# Altium PCB HDD.PcbDoc
Units mm, origin at the board's own origin, x right, y up, seen from the top; angles counter-clockwise.
Board outline 75 x 50 mm, 2 copper layers (Top Layer, Bottom Layer); 40 components, 27 nets, 94 pads, 174 vias.
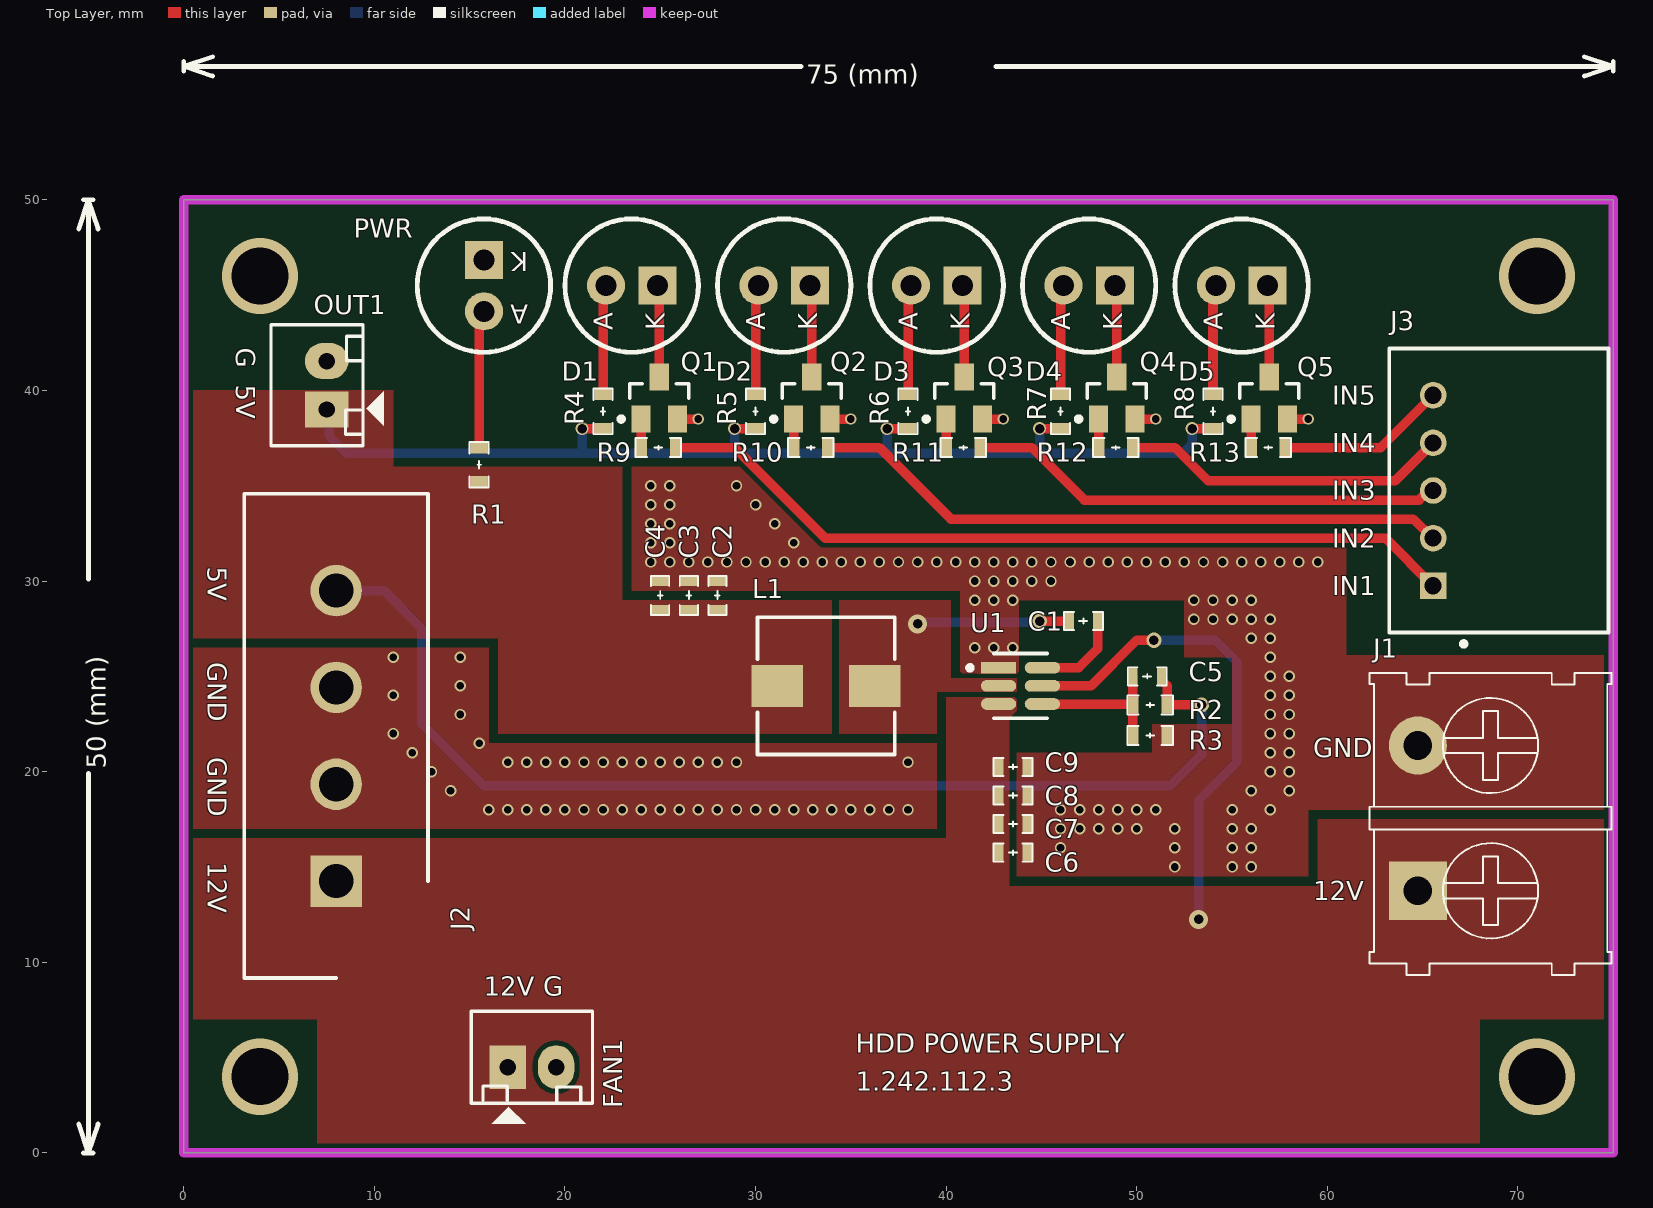
[diagram p0: Top Layer view]
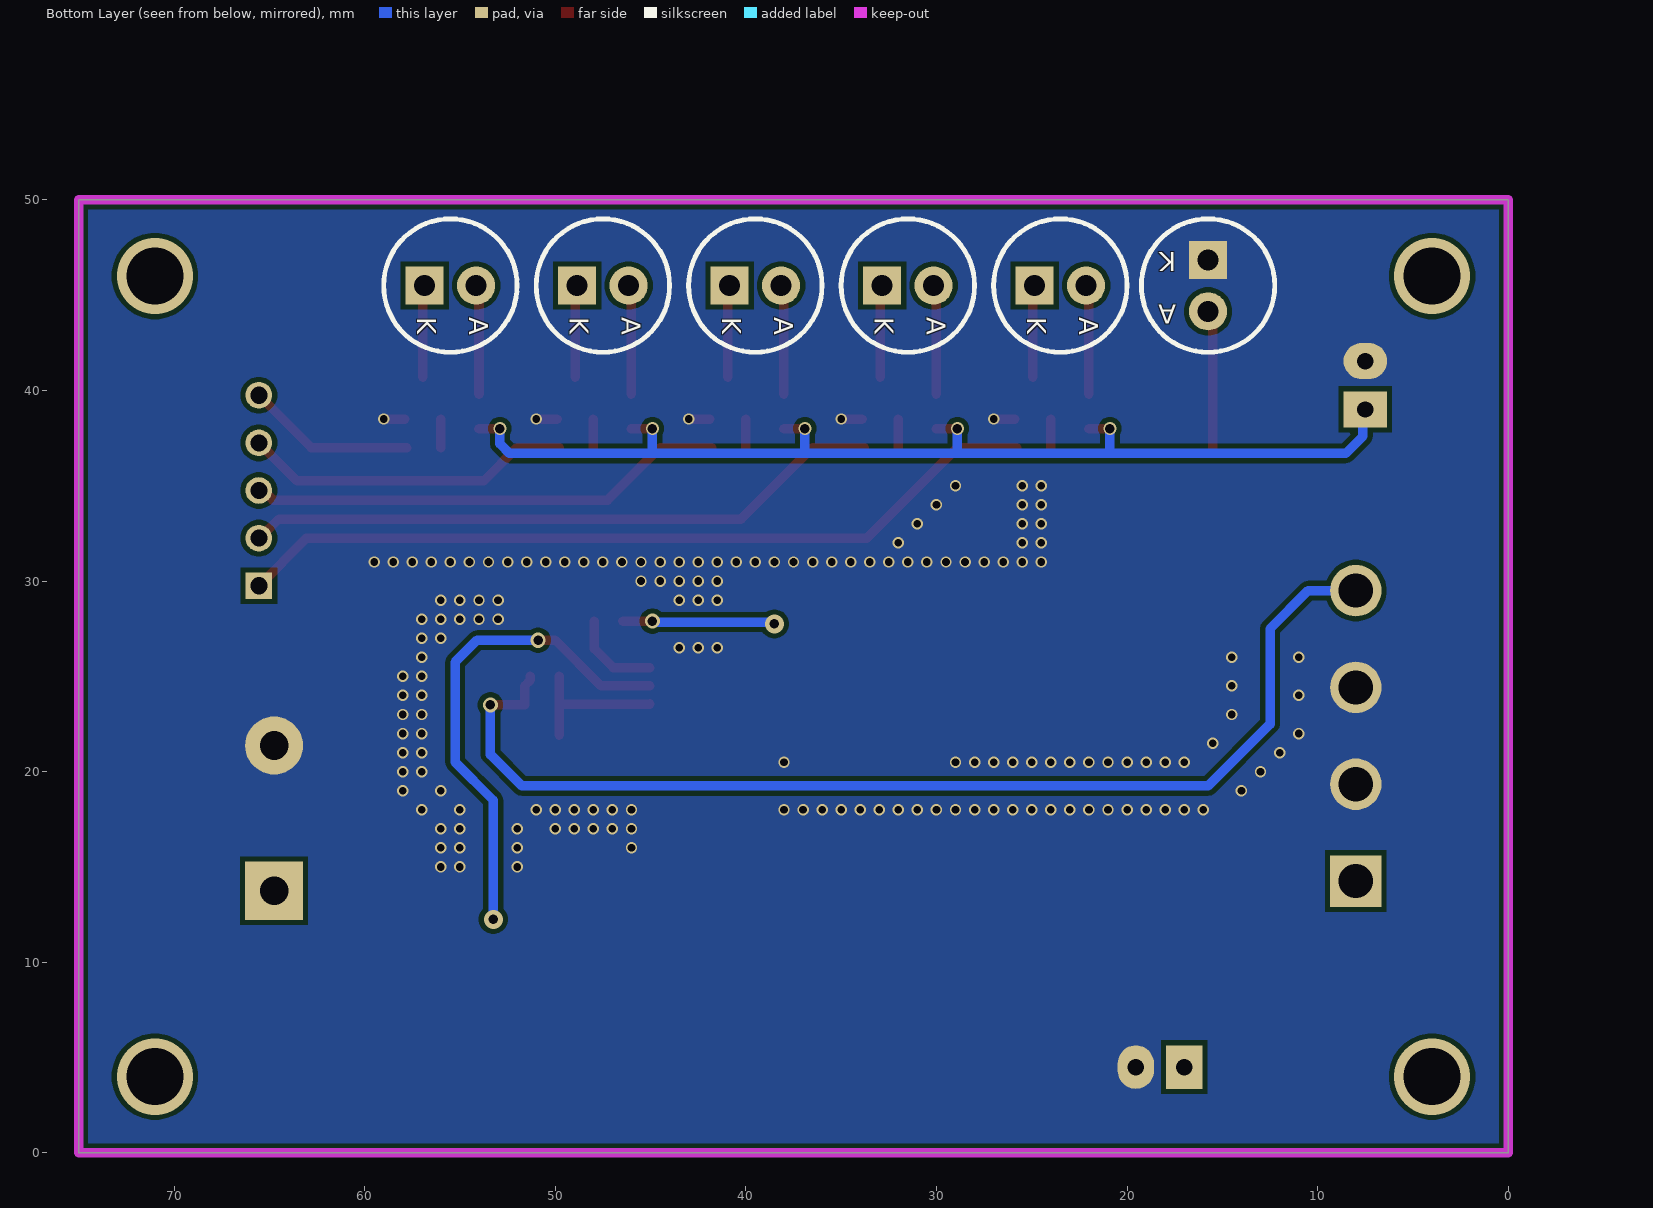
[diagram p1: Bottom Layer view, seen from below]
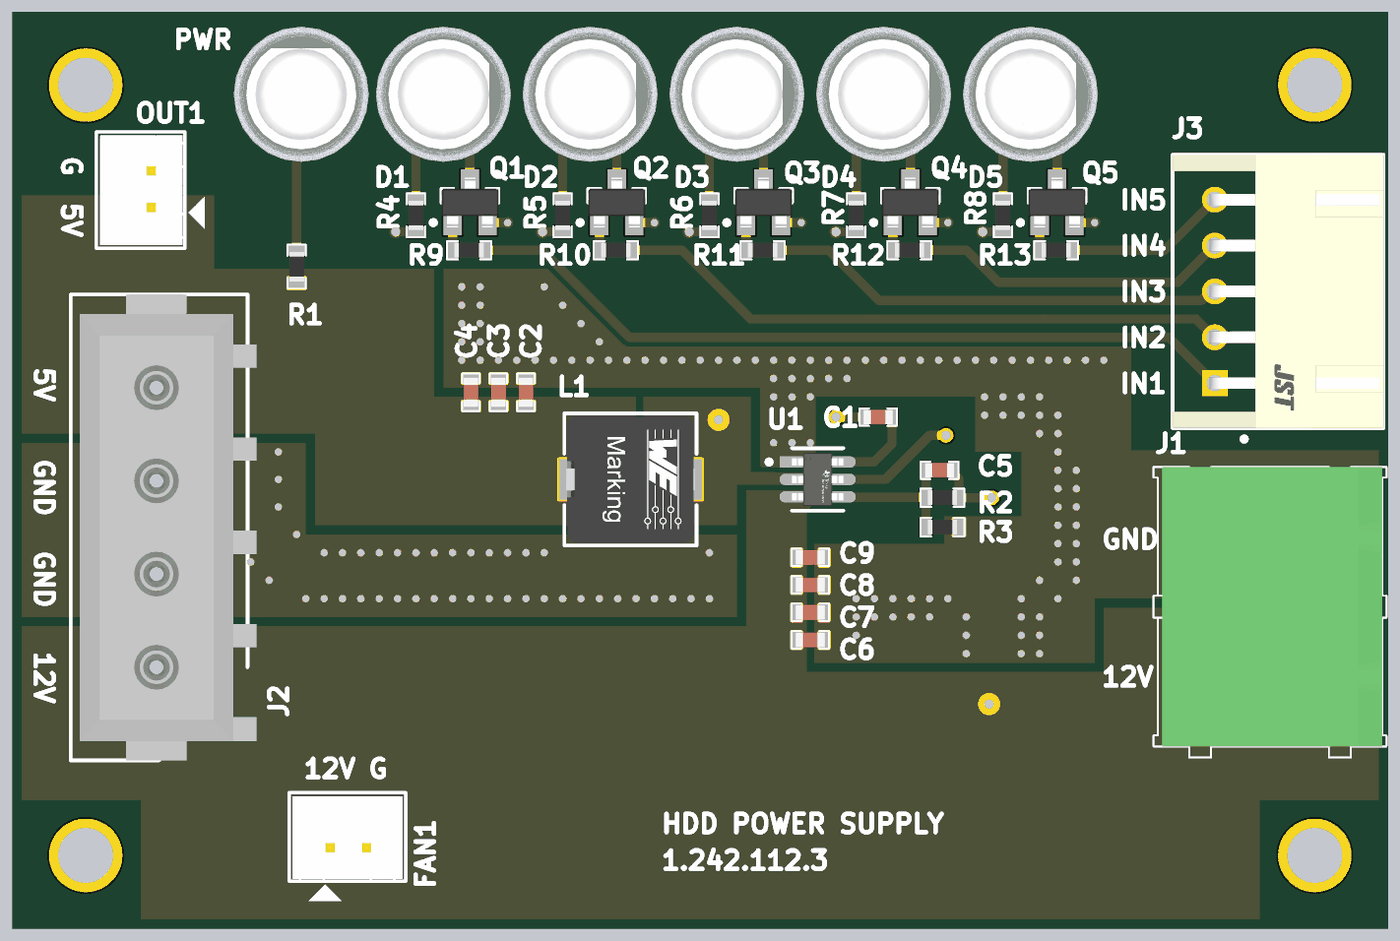
[diagram p2: 3D render of the assembled board from above, using the file's embedded part models]

## Layer stack, top to bottom
Top Solder: solder mask 0.0102, Solder Resist, Dk 3.5
Top Layer: signal copper 0.0356
Dielectric 1: dielectric 0.32, FR-4, Dk 4.8
Bottom Layer: signal copper 0.0356
Bottom Solder: solder mask 0.0102, Solder Resist, Dk 3.5

## Board outline
0,0 0,50 75,50 75,0

## Design rules (kind name [scope] priority, off if disabled: settings)
Clearance [All] p1: gap=0.254 ignorepadtopadclearanceinfootprint=FALSE
HoleSize [All] p1: absolutevalues=TRUE maxlimit=5 minlimit=0.2 maxpercent=80.000 minpercent=20.000
PolygonConnect [All] p1: connectstyle=Direct reliefconductorwidth=0.254 reliefentries=4 polygonreliefangle="90 Angle" airgapwidth=0.254
RoutingVias [All] p1: holewidth=0.2 width=1 viastyle="Through Hole" minholewidth=0.2 minwidth=0.5 maxholewidth=0.2 maxwidth=5
SilkToSilkClearance [All] p1: silktosilkclearance=0.01
SilkToSolderMaskClearance [IsPad vs InPadClass('All Pads')] p1: minsilkscreentomaskgap=0 clearancetoexposedcopper=TRUE
SolderMaskExpansion [All] p1: expansion=0.102 istentingtop=FALSE
Width [All] p1: maxlimit=0.5 minlimit=0.5 preferedwidth=0.5
27 further rules are at their usual default settings.

## Components (designator, comment, footprint, x,y, rotation, side; value= is the part's Value field where it differs from the comment)
C1 "0.1u" CAP-CER-0603 47.2,27.9 r0 top
C2 "10u" CAP-CER-0603 28,29.25 r270 top
C3 "22u" CAP-CER-0603 26.5,29.25 r270 top
C4 "22u" CAP-CER-0603 25,29.25 r270 top
C5 "0.1u" CAP-CER-0603 50.55,25 r0 top
C6 "10u" CAP-CER-0603 43.5,15.75 r180 top
C7 "10u" CAP-CER-0603 43.5,17.25 r180 top
C8 "0.1u" CAP-CER-0603 43.5,18.75 r180 top
C9 "0.1u" CAP-CER-0603 43.5,20.25 r180 top
D1 "LED" SLM-490 23.5,45.5 r90 top
D2 "LED" SLM-490 31.5,45.5 r90 top
D3 "LED" SLM-490 39.5,45.5 r90 top
D4 "LED" SLM-490 47.5,45.5 r90 top
D5 "LED" SLM-490 55.5,45.5 r90 top
FAN1 "Header2" Header2 17,4.5 r0 top
J1 "KF2" KF2-7.62 68.56,17.56 r90 top
J2 "770997-1" RHDR4W158P0X508_1X4_2540X965X1156P 8,14.26 r90 top
J3 "S5B-XH-A(LF)(SN)" FP-S5B-XH-A_LF_SN-MFG 69,34.75 r270 top
L1 "2.2u" WE-HCI_7040 33.7,24.5 r270 top
OUT1 "Header2" Header2 7.5,39 r90 top
PWR "LED" SLM-490 15.75,45.5 r180 top
Q1 "MMBT3904" FAIR-SOT23-3_V 24.95,39.6 r90 top
Q2 "MMBT3904" FAIR-SOT23-3_V 32.95,39.6 r90 top
Q3 "MMBT3904" FAIR-SOT23-3_V 40.95,39.6 r90 top
Q4 "MMBT3904" FAIR-SOT23-3_V 48.95,39.6 r90 top
Q5 "MMBT3904" FAIR-SOT23-3_V 56.95,39.6 r90 top
R1 "1k" RES-SMD-0603 15.5,36.1 r90 top
R2 "56k" RES-SMD-0603 50.7,23.5 r0 top
R3 "10k" RES-SMD-0603 50.7,21.9 r180 top
R4 "1k" RES-SMD-0603 22,38.9 r270 top
R5 "1k" RES-SMD-0603 30,38.9 r270 top
R6 "1k" RES-SMD-0603 38,38.9 r270 top
R7 "1k" RES-SMD-0603 46,38.9 r270 top
R8 "1k" RES-SMD-0603 54,38.9 r270 top
R9 "330R" RES-SMD-0603 24.9,37 r180 top
R10 "330R" RES-SMD-0603 32.9,37 r180 top
R11 "330R" RES-SMD-0603 40.9,37 r180 top
R12 "330R" RES-SMD-0603 48.9,37 r180 top
R13 "330R" RES-SMD-0603 56.9,37 r180 top
U1 "TPS565208DDCR" FP-DDC0006A-IPC_A 43.9,24.5 r0 top

## Footprints (in the part's own frame and the unit in brackets; to place one, negate y for a bottom-side part, rotate by r counter-clockwise, add the part's x,y. Pads: shape width x height; smd on the part's side, far side on the other; paste and mask are expansions set on the pad)
CAP-CER-0603 [mm]
  rect 0.5x0.9 smd: 1(-0.75,0) 2(0.75,0)
  silkscreen extent -1.02,-0.48 1.02,0.48, body extent -0.8,-0.4 0.8,0.4, height 0.3
FAIR-SOT23-3_V [mm] "SOT23, 3-Leads, Body 3.12x1.5mm, Pitch 0.95mm"
  rect 1.4x1 smd: 1(-1.1,0.95) 2(-1.1,-0.95) 3(1.1,0)
  silkscreen extent -1.22,-1.55 0.75,2.12, body extent -1.35,-1.56 1.35,1.56, height 1.2
FP-DDC0006A-IPC_A [mm]
  rect 1.854x0.612 smd paste+0 mask+0: 1(-1.15,0.95)
  rrect100% 1.854x0.612 smd paste+0 mask+0: 2(-1.15,0) 3(-1.15,-0.95) 4(1.15,-0.95) 5(1.15,0) 6(1.15,0.95)
  silkscreen extent -2.77,-1.7 1.4,1.7, body extent -2.58,-1.95 2.58,1.95, height 0.25
FP-S5B-XH-A_LF_SN-MFG [mm]
  rect 1.4x1.4 hole 0.9 paste-2539.97 mask+0: 1(5,-3.45)
  round 1.4 hole 0.9 paste-2539.97 mask+0: 2(2.5,-3.45) 3(0,-3.45) 4(-2.5,-3.45) 5(-5,-3.45)
  silkscreen extent -7.45,-5.75 8.17,5.75, body extent -7.55,-5.85 7.55,5.85, height 0.25
Header2 [mil] "CON2"
  rect 75x90 hole 34: 1(0,0)
  oval 75x90 hole 34: 2(100,0)
  silkscreen extent -75,-118 175,115, body extent -68,-70 168,107, height 236
KF2-7.62 [mil]
  rect 120x120 hole 59.06: 1(-150,150)
  round 120 hole 59.06: 2(150,150)
  silkscreen extent -324,-250 300,250, body extent -300,-241 300,231, height 337
RES-SMD-0603 [mm]
  rect 0.6x0.9 smd: 1(-0.9,0) 2(0.9,0)
  silkscreen extent -1.2,-0.5 1.2,0.5, body extent -0.8,-0.4 0.8,0.4, height 0.45
RHDR4W158P0X508_1X4_2540X965X1156P [mm]
  rect 2.7x2.7 hole 1.8: 1(0,0)
  round 2.7 hole 1.8: 2(5.08,0) 3(10.16,0) 4(15.24,0)
  silkscreen extent -5.08,-4.82 20.32,4.82, body extent -5.08,-5.32 20.32,4.33, height 11.17
SLM-490 [mm]
  round 2 hole 1.1: A(0,1.35)
  rect 2x2 hole 1.1: K(0,-1.35)
  silkscreen extent -3.5,-3.5 3.5,3.5, body extent -3.68,-3.68 3.68,3.68, height 21.8
WE-HCI_7040 [mm] "SMT Flat Wire High Current Inductor, body 6.9x6.9mm"
  rect 2.2x2.7 smd: 1(0,2.55) 2(0,-2.55)
  silkscreen extent -3.6,-3.6 3.6,3.6, body extent -3.45,-3.5 3.45,3.5, height 4

## Part data
C1 C2 C3 C4 C5 C6 C7 C8 C9: library part "Non-Polar Cap"
D1 D2 D3 D4 D5 PWR: library part LED_5MM_HOLDER_16MM1, "5mm LED Holder Height 16.1mm (w/o LED)", Manufacturer=BIVAR, Manufacturer Part Number=SLM-490
FAN1 OUT1: "Header IDC, 2 x 1 Pin Vertical 2.54mm Pitch (Non-Boxed, Male)", Manufacturer="W¨¹rth Elektronik eiSos GmbH", partNo=613002143121, ComponentLink1 Description=Manufacturer, ComponentLink1URL=http://www.we-online.com, ComponentLink2 Description=Datasheet, ComponentLink2URL=http://katalog.we-online.de/em/datasheet/6130xx143121.pdf, Created by="Karrer Zheng", Created Date="29 March 2013", NoPins=02
J1: Manufacturer="Würth Elektronik eiSos GmbH", partNo=691103110002, ComponentLink1 Description=Manufacturer, ComponentLink1URL=http://www.we-online.com, ComponentLink2 Description=Datasheet, ComponentLink2URL=http://katalog.we-online.de/em/datasheet/6911031100xx.pdf, Created by="Karrer Zheng", Created Date="29 October 2013", NoPins=2
J2: "Connector", Manufacturer_Name="TE Connectivity", Mouser Part Number=571-7709971, Arrow Part Number=770997-1, Arrow Price/Stock=https://www.arrow.com/en/products/770997-1/te-connectivity?region=europe, Datasheet Link=https://www.te.com/commerce/DocumentDelivery/DDEController?Action=srchrtrv&DocNm=82181_SOFTSHELL_STANDARD_DENSITY&DocType=Catalog%20Section&DocLang=English&PartCntxt=770997-1&DocFormat=pdf, Height=11.56mm, Manufacturer_Part_Number=770997-1, Mouser Price/Stock=https://www.mouser.co.uk/ProductDetail/TE-Connectivity/770997-1?qs=qXO2HHLAcoJUuzWkn0Acdg%3D%3D
J3: library part CMP-17439-000302-1, "CONN HEADER R/A 5POS 2.5MM", Color=Natural, Contact Resistance=10mR, Current Rating=3A, Flammability Rating="UL94 V-0", Insulation Resistance=1GR, Max Operating Temperature=85°C, Min Operating Temperature=-25°C, Voltage Rating=250V, Connector Type=Header, Contact Finish - Mating=TIN, Contact Material=Brass, Contact Plating=Tin, Contact Shape=Square, Contact Type="Male Pin", Fastening Type=Detent, Insulation Color=Natural, Insulation Material=Nylon, Lead Free="Lead Free", Lead Pitch=2.5mm, Mount="Through Hole", Number of Contacts=5, Number of Positions=5, Number of Rows=1, Orientation="Right Angle", Packaging=Bulk, Pitch=2.5mm, REACH SVHC="No SVHC", Series=XH, Termination=Solder, Voltage Rating (AC)=250V, Wire/Cable Gauge=22AWG
L1: library part CMP-0226-00075-3, Ambient Temperature Range High=100°C, Ambient Temperature Range Low=-40°C, Case/Package=7040, Current Rating=9A, DC Resistance (DCR)=11.4mΩ, Inductance=2.2µH, Inductance Tolerance=20%, Max Operating Temperature=150°C, Saturation Current=13A, Self Resonant Frequency=52MHz, Series Resistance=12.54mΩ, Test Frequency=100kHz, Composition=Wirewound, Depth=6.9mm, Height=3.8mm, Height - Seated (Max)=3.9878mm, Lead Free="Lead Free", Length=7mm, Max DC Current=9A, Min Operating Temperature=-40°C, Mount="Surface Mount", NexarPartId=7864287, Number of Pins=2, Packaging="Cut Tape (CT)", REACH SVHC=Unknown, Resistance=11.4mΩ, RMS Current (Irms)=9A, RoHS=Compliant, Shielding=Shielded, Termination=SMD/SMT, Tolerance=20%, Width=6.9mm
Q1 Q2 Q3 Q4 Q5: library part CMP-1670-00008-1, "NPN General Purpose Amplifier, 40 V, 0.2 A, -55 to 150 degC, 3-Pin SOT23, RoHS, Tape and Reel", Capacitance="1.8E-11 f", Frequency="12.288 MHz", Frequency Tolerance=30ppm, Load Capacitance="18 pF", Max Operating Temperature=70degC, Min Operating Temperature=-20degC, Package Quantity=1000, ComponentLink1Description="Manufacturer URL", ComponentLink1URL=https://www.fairchildsemi.com/, ComponentLink2Description=Datasheet, ComponentLink2URL=https://www.fairchildsemi.com/datasheets/MM/MMBT3904.pdf, ComponentLink3Description="Package Specification", ComponentLink3URL=http://www.fairchildsemi.com/dwg/MA/MA03D.pdf, DatasheetVersion="Rev. 1.1.0, 10/2014", ESR="40 Ohm", Height="0.041 inch", Length="0.197 inch", Mount="Surface Mount", PackageDescription="3-Pin Small Outline Transistor, Body 2.92 x 1.325 mm, Pitch 0.95 mm", PackageReference=SOT23-3, Packaging="Tape and Reel", Pins=4, REACH SVHC="No SVHC", RoHSCompliant=True, Tolerance=30ppm, Width="0.126 inch"
R1 R2 R3 R4 R5 R6 R7 R8 R9 R10 R11 R12 R13: library part Res
U1: library part CMP-04918-000154-1, "IC REG BUCK ADJ 5A TSOT23-6", Case/Package=SOT-23-6, Max Input Voltage=17V, Max Operating Temperature=125°C, Max Output Voltage=7V, Min Input Voltage=4.5V, Min Operating Temperature=-40°C, Min Output Voltage=760mV, Output Current=5A, Switching Frequency=500kHz, Mount="Surface Mount", Number of Outputs=1, Number of Pins=6, Output Configuration=Positive, Output Type=Adjustable, Packaging="Tape and Reel", Synchronous Rectifier=Yes

## Via types
v1: diameter 0.6, hole 0.4, Top Layer to Bottom Layer, tented both sides, 160 vias
v2: diameter 0.7, hole 0.5, Top Layer to Bottom Layer, tented both sides, 5 vias
v3: diameter 4, hole 3, Top Layer to Bottom Layer, 4 vias
v4: diameter 0.8, hole 0.5, Top Layer to Bottom Layer, 3 vias
v5: diameter 1, hole 0.5, Top Layer to Bottom Layer, 2 vias

## Nets (pads, with @x,y where several pads share a name; then routed paths per layer and width w, separated by ;. In a path a pad name is that pad's centre, name@x,y a point inside that pad or via, vN(x,y) a via of type N, cw(c..) or ccw(c..) an arc to the next point about the centre after c; other vN are vias at no path point)
5VDC: C2.2 C3.2 C4.2 C5.2 J2.4 L1.2 OUT1.1 R1.1 R2.2 R4.2 R5.2 R6.2 R7.2 R8.2 | length 118.2
  Top Layer w0.5: v2(20.9,38) R4.2 ; v2(28.9,38) R5.2 ; v2(36.9,38) R6.2 ; v2(44.9,38) R7.2 ; C5.2 51.3,24.8 51.307,24.8 51.6,24.507 R2.2 v4(53.4,23.5) ; v2(52.9,38) R8.2
  Bottom Layer w0.5: OUT1.1 7.637,38.863 7.637,37.59 8.528,36.7 20.9,36.7 ; J2.4 10.5,29.5 12.5,27.5 12.5,22.5 15.75,19.25 51.75,19.25 53.4,20.9 v4(53.4,23.5) ; v2(20.9,38) 20.9,36.7 ; v2(28.9,38) 28.9,36.8 28.8,36.7 ; v2(36.9,38) 36.9,36.8 36.8,36.7 ; v2(44.9,38) 44.9,36.8 45,36.7 ; v2(52.9,38) 52.9,37.2 52.4,36.7 45,36.7 ; 20.9,36.7 28.8,36.7 ; 28.8,36.7 36.8,36.7 ; 36.8,36.7 45,36.7
12VDC: C6.2 C7.2 C8.2 C9.2 FAN1.1 J1.1 J2.1 U1.3 U1.5 | length 25.7
  Top Layer w0.5: U1.5 47.6,24.5 50,26.9 v4(50.9,26.9)
  Bottom Layer w0.5: v4(50.9,26.9) 54.1,26.9 55.25,25.75 55.25,20.5 53.25,18.5 v5@53.25,12.5
  other v5: 53.25,12.25
GND: C2.1 C3.1 C4.1 C6.1 C7.1 C8.1 C9.1 FAN1.2 J1.2 J2.2 J2.3 OUT1.2 PWR.K Q1.2 Q2.2 Q3.2 Q4.2 Q5.2 R3.1 U1.1 | length 5.5
  Top Layer w0.5: Q1.2 v1(27,38.5) ; Q2.2 v1(35,38.5) ; Q3.2 v1(43,38.5) ; Q4.2 v1(51,38.5) ; Q5.2 v1(59,38.5)
  other v1: 52,15 55,15 56,15 46,16 52,16 55,16 56,16 46,17 47,17 48,17 49,17 50,17 52,17 55,17 56,17 16,18 17,18 18,18 19,18 20,18 21,18 22,18 23,18 24,18 25,18 26,18 27,18 28,18 29,18 30,18 31,18 32,18 33,18 34,18 35,18 36,18 37,18 38,18 46,18 47,18 48,18 49,18 50,18 51,18 55,18 57,18 14,19 56,19 58,19 13,20 57,20 58,20 17,20.5 18,20.5 19,20.5 20,20.5 21,20.5 22,20.5 23,20.5 24,20.5 25,20.5 26,20.5 27,20.5 28,20.5 29,20.5 38,20.5 12,21 57,21 58,21 15.5,21.5 11,22 57,22 58,22 14.5,23 57,23 58,23 11,24 57,24 58,24 14.5,24.5 57,25 58,25 11,26 14.5,26 57,26 41.5,26.5 42.5,26.5 43.5,26.5 56,27 57,27 53,28 54,28 55,28 56,28 57,28 41.5,29 42.5,29 43.5,29 53,29 54,29 55,29 56,29 41.5,30 42.5,30 43.5,30 44.5,30 45.5,30 24.5,31 25.5,31 26.5,31 27.5,31 28.5,31 29.5,31 30.5,31 31.5,31 32.5,31 33.5,31 34.5,31 35.5,31 36.5,31 37.5,31 38.5,31 39.5,31 40.5,31 41.5,31 42.5,31 43.5,31 44.5,31 45.5,31 46.5,31 47.5,31 48.5,31 49.5,31 50.5,31 51.5,31 52.5,31 53.5,31 54.5,31 55.5,31 56.5,31 57.5,31 58.5,31 59.5,31 24.5,32 25.5,32 32,32 24.5,33 25.5,33 31,33 24.5,34 25.5,34 30,34 24.5,35 25.5,35 29,35
IN1: J3.1 R9.1 | length 42.8
  Top Layer w0.5: R9.1 28.9,37 33.65,32.25 63.05,32.25 J3.1
IN2: J3.2 R10.1 | length 33.7
  Top Layer w0.5: R10.1 36.5,37 40.246,33.254 64.503,33.254 65.507,32.25 J3.2
IN3: J3.3 R11.1 | length 25.1
  Top Layer w0.5: R11.1 44.5,37 47.25,34.25 64.807,34.25 65.307,34.75 J3.3
IN4: J3.4 R12.1 | length 17.3
  Top Layer w0.5: R12.1 52,37 53.75,35.25 63.55,35.25 J3.4
IN5: J3.5 R13.1 | length 8.9
  Top Layer w0.5: R13.1 62.8,37 J3.5
NetC1_1: C1.1 L1.1 U1.2 | length 8
  Top Layer w0.5: v4(44.9,27.9) C1.1
  Bottom Layer w0.5: v5(38.5,27.75) 38.593,27.843 44.843,27.843 v4(44.9,27.9)
NetC1_2: C1.2 U1.6 | length 4.8
  Top Layer w0.5: U1.6 46.95,25.45 47.95,26.45 C1.2
NetC5_1: C5.1 R2.1 R3.2 U1.4 | length 7.9
  Top Layer w0.5: U1.4 45.072,23.529 R2.1@49.771,23.529 ; R3.2 R2.1 R2.1@49.771,23.529 ; C5.1 49.8,23.557 R2.1@49.771,23.529
NetD1_A: D1.A R4.1 | length 5.8
  Top Layer w0.5: R4.1 22,45.35 D1.A
NetD1_K: D1.K Q1.3 | length 4.8
  Top Layer w0.5: D1.K 24.95,45.4 Q1.3
NetD2_A: D2.A R5.1 | length 5.8
  Top Layer w0.5: R5.1 30,45.35 D2.A
NetD2_K: D2.K Q2.3 | length 4.8
  Top Layer w0.5: D2.K 32.95,45.4 Q2.3
NetD3_A: D3.A R6.1 | length 5.8
  Top Layer w0.5: R6.1 38,45.35 D3.A
NetD3_K: D3.K Q3.3 | length 4.8
  Top Layer w0.5: D3.K 40.95,45.4 Q3.3
NetD4_A: D4.A R7.1 | length 5.8
  Top Layer w0.5: R7.1 46,45.35 D4.A
NetD4_K: D4.K Q4.3 | length 4.8
  Top Layer w0.5: D4.K 48.95,45.4 Q4.3
NetD5_A: D5.A R8.1 | length 5.8
  Top Layer w0.5: R8.1 54,45.35 D5.A
NetD5_K: D5.K Q5.3 | length 4.8
  Top Layer w0.5: D5.K 56.95,45.4 Q5.3
NetPWR_A: PWR.A R1.2 | length 7.3
  Top Layer w0.5: R1.2 15.5,43.9 PWR.A
NetQ1_1: Q1.1 R9.2 | length 1.5
  Top Layer w0.5: R9.2 Q1.1
NetQ2_1: Q2.1 R10.2 | length 1.5
  Top Layer w0.5: R10.2 Q2.1
NetQ3_1: Q3.1 R11.2 | length 1.5
  Top Layer w0.5: R11.2 Q3.1
NetQ4_1: Q4.1 R12.2 | length 1.5
  Top Layer w0.5: R12.2 Q4.1
NetQ5_1: Q5.1 R13.2 | length 1.5
  Top Layer w0.5: R13.2 Q5.1
copper on no net:
  other v3: 4,4 71,4 4,46 71,46

## Polygon pours and split planes (outlines as drawn)
GND on Top Layer "GND_L01_P007" (solid, remove dead copper, pour order 7): 0,26.5 16,26.5 16,21.5 39.5,21.5 39.5,17 0,17
GND on Top Layer "GND_L01_P005" (solid, remove dead copper, pour order 5): 23.5,36 23.5,29.5 40.75,29.5 40.75,25.25 40.9,25.1 43.8,25.1 43.8,29 52.5,29 52.5,26 55,26 55,22.5 50.8,22.5 50.8,21 43.7,21 43.7,14.5 59,14.5 59,18 75.6,18 75,18.6 75,26.1 61,26.1 61,36
5VDC on Top Layer "5VDC_L01_P003" (solid, remove dead copper, pour order 3): 0,40 11,40 11,36 23,36 23,29 34,29 34,22 16.5,22 16.5,27 0,27
NetC1_1 on Top Layer "NETC1_1_L01_P002" (solid, remove dead copper, pour order 2): 43.7,24.9 40.25,24.9 40.25,29 34.4,29 34.4,22 39.5,22 39.5,24.2 43.7,24.2 38.5,24.2 43.7,24.2
12VDC on Top Layer "12VDC_L01_P001" (solid, remove dead copper, pour order 1): 43.3,14 43.3,22.8 43.7,23.2 43.7,23.8 43.6,23.9 40,23.9 40,16.5 13.5,16.5 0,16.5 0,7 7,7 7,0 68,0 68,7 75,7 75,17.5 59.5,17.5 59.5,14
GND on Bottom Layer "GND_L02_P006" (solid, remove dead copper, pour order 6): 0,0 75,0 75,50 0,50

## Keep-outs
Keep-Out Layer:
  the board outline again, w0.5

## Silkscreen, mask and mechanical layers (free items; w line width, h text height)
Top Overlay:
  lines w0.254: -5.508,1.524 -5,0 ; -5.508,48.476 -5,50 ; -5.254,0 -4.746,0 ; -5.254,50 -4.746,50 ; -5,19.896 -5,0 ; -5,30.104 -5,50 ; -4.492,1.524 -5,0 ; -4.492,48.476 -5,50 ; 0,56.746 0,57.254 ; 1.524,56.492 0,57 ; 1.524,57.508 0,57 ; 32.396,57 0,57 ; 42.604,57 75,57 ; 73.476,56.492 75,57 ; 73.476,57.508 75,57 ; 75,56.746 75,57.254
  text "75 (mm)" at 32.65,56.086 h1
  text "G  5V" at 2.754,42.246 h1 r270
  text "IN5" at 60.254,39.254 h1
  text "IN4" at 60.254,36.754 h1
  text "IN3" at 60.254,34.254 h1
  text "IN2" at 60.254,31.754 h1
  text "5V" at 1.254,30.746 h1 r270
  text "IN1" at 60.254,29.254 h1
  text "GND" at 1.254,25.746 h1 r270
  text "GND" at 1.254,20.746 h1 r270
  text "GND" at 59.254,20.754 h1
  text "50 (mm)" at -4.086,20.15 h1 r90
  text "12V" at 1.254,15.246 h1 r270
  text "12V" at 59.254,13.254 h1
  text "12V G" at 15.754,8.254 h1
  text "HDD POWER SUPPLY" at 35.254,5.254 h1
  text "1.242.112.3" at 35.254,3.254 h1
Drill Drawing:
  circle w0.254: c78.77,13.496 r0.556
  lines w0.254: 78.214,10.996 78.77,10.44 79.325,10.996 78.77,11.552 78.214,10.996 ; 78.214,15.44 78.214,15.718 78.492,15.996 78.214,16.274 78.214,16.552 78.492,16.552 78.77,16.274 79.048,16.552 79.325,16.552 79.325,16.274 79.048,15.996 79.325,15.718 79.325,15.44 79.048,15.44 78.77,15.718 78.492,15.44 78.214,15.44 ; 78.214,19.052 79.325,19.052 78.77,17.94 78.214,19.052 ; 78.214,20.718 78.492,20.718 78.492,20.44 79.048,20.44 79.048,20.718 79.325,20.718 79.325,21.274 79.048,21.274 79.048,21.552 78.492,21.552 78.492,21.274 78.214,21.274 78.214,20.718 ; 78.214,23.218 78.492,23.218 78.77,22.94 79.048,23.218 79.325,23.218 79.048,23.496 79.325,23.774 79.048,23.774 78.77,24.052 78.492,23.774 78.214,23.774 78.492,23.496 78.214,23.218 ; 78.214,25.44 78.77,25.718 79.325,25.44 79.048,25.996 79.325,26.552 78.77,26.274 78.214,26.552 78.492,25.996 78.214,25.44 ; 78.214,27.94 79.325,27.94 79.325,29.052 78.214,29.052 78.214,27.94 ; 78.437,28.163 79.103,28.163 79.103,28.829 78.437,28.829 78.437,28.163
  lines w0.381: 77.191,9.69 208.784,9.69 ; 77.191,29.69 208.784,29.69 ; 86.651,7.191 86.651,32.19 ; 96.657,7.191 96.657,32.19 ; 115.493,7.191 115.493,32.19 ; 124.203,7.191 124.203,32.19 ; 136.713,7.191 136.713,32.19 ; 161.88,7.191 161.88,32.19 ; 171.99,7.191 171.99,32.19 ; 184.7,7.191 184.7,32.19 ; 77.191,7.191 208.784,7.191 208.784,32.19 77.191,32.19 77.191,7.191
  text "Symbol" at 78.69,30.44 h1.2
  text "Count" at 87.401,30.44 h1.2
  text "Hole Size" at 97.407,30.44 h1.2
  text "Plated" at 116.243,30.44 h1.2
  text "Hole Type" at 124.953,30.44 h1.2
  text "Drill Layer Pair" at 137.463,30.44 h1.2
  text "Via/Pad" at 162.63,30.44 h1.2
  text "Pad Shape" at 172.74,30.44 h1.2
  text "Template" at 185.45,30.44 h1.2
  text "2" at 87.401,27.94 h1
  text "1.500mm (59.06mil)" at 97.407,27.94 h1
  text "PTH" at 116.243,27.94 h1
  text "Round" at 124.953,27.94 h1
  text "Top Layer - Bottom Layer" at 137.463,27.94 h1
  text "Pad" at 162.63,27.94 h1
  text "(Mixed)" at 172.74,27.94 h1
  text "(Mixed)" at 185.45,27.94 h1
  text "4" at 87.401,25.44 h1
  text "0.864mm (34.00mil)" at 97.407,25.44 h1
  text "PTH" at 116.243,25.44 h1
  text "Round" at 124.953,25.44 h1
  text "Top Layer - Bottom Layer" at 137.463,25.44 h1
  text "Pad" at 162.63,25.44 h1
  text "(Mixed)" at 172.74,25.44 h1
  text "(Mixed)" at 185.45,25.44 h1
  text "4" at 87.401,22.94 h1
  text "1.800mm (70.87mil)" at 97.407,22.94 h1
  text "PTH" at 116.243,22.94 h1
  text "Round" at 124.953,22.94 h1
  text "Top Layer - Bottom Layer" at 137.463,22.94 h1
  text "Pad" at 162.63,22.94 h1
  text "(Mixed)" at 172.74,22.94 h1
  text "(Mixed)" at 185.45,22.94 h1
  text "4" at 87.401,20.44 h1
  text "3.000mm (118.11mil)" at 97.407,20.44 h1
  text "PTH" at 116.243,20.44 h1
  text "Round" at 124.953,20.44 h1
  text "Top Layer - Bottom Layer" at 137.463,20.44 h1
  text "Via" at 162.63,20.44 h1
  text "Rounded" at 172.74,20.44 h1
  text "v400h300_2670034071" at 185.45,20.44 h1
  text "5" at 87.401,17.94 h1
  text "0.900mm (35.43mil)" at 97.407,17.94 h1
  text "PTH" at 116.243,17.94 h1
  text "Round" at 124.953,17.94 h1
  text "Top Layer - Bottom Layer" at 137.463,17.94 h1
  text "Pad" at 162.63,17.94 h1
  text "(Mixed)" at 172.74,17.94 h1
  text "(Mixed)" at 185.45,17.94 h1
  text "10" at 87.401,15.44 h1
  text "0.500mm (19.69mil)" at 97.407,15.44 h1
  text "PTH" at 116.243,15.44 h1
  text "Round" at 124.953,15.44 h1
  text "Top Layer - Bottom Layer" at 137.463,15.44 h1
  text "Via" at 162.63,15.44 h1
  text "Rounded" at 172.74,15.44 h1
  text "(Mixed)" at 185.45,15.44 h1
  text "12" at 87.401,12.94 h1
  text "1.100mm (43.31mil)" at 97.407,12.94 h1
  text "PTH" at 116.243,12.94 h1
  text "Round" at 124.953,12.94 h1
  text "Top Layer - Bottom Layer" at 137.463,12.94 h1
  text "Pad" at 162.63,12.94 h1
  text "(Mixed)" at 172.74,12.94 h1
  text "(Mixed)" at 185.45,12.94 h1
  text "158" at 87.401,10.44 h1
  text "0.400mm (15.75mil)" at 97.407,10.44 h1
  text "PTH" at 116.243,10.44 h1
  text "Round" at 124.953,10.44 h1
  text "Top Layer - Bottom Layer" at 137.463,10.44 h1
  text "Via" at 162.63,10.44 h1
  text "Rounded" at 172.74,10.44 h1
  text "v60h40m0mx0_2670034071" at 185.45,10.44 h1
  text "199 Total" at 87.401,7.94 h1

## Text inside footprints (layer, text, board x,y; h text height)
D1: Top Overlay "A" at 22.5,43.167 h1 r90; Top Overlay "K" at 25.25,43.167 h1 r90; Bottom Overlay "K" at 25.25,43.833 h1 r90; Bottom Overlay "A" at 22.5,43.833 h1 r90; Mechanical 13 "A" at 22.5,45.167 h1 r90; Mechanical 13 "K" at 25.25,45.167 h1 r90
D2: Top Overlay "A" at 30.5,43.167 h1 r90; Top Overlay "K" at 33.25,43.167 h1 r90; Bottom Overlay "K" at 33.25,43.833 h1 r90; Bottom Overlay "A" at 30.5,43.833 h1 r90; Mechanical 13 "A" at 30.5,45.167 h1 r90; Mechanical 13 "K" at 33.25,45.167 h1 r90
D3: Top Overlay "A" at 38.5,43.167 h1 r90; Top Overlay "K" at 41.25,43.167 h1 r90; Bottom Overlay "K" at 41.25,43.833 h1 r90; Bottom Overlay "A" at 38.5,43.833 h1 r90; Mechanical 13 "A" at 38.5,45.167 h1 r90; Mechanical 13 "K" at 41.25,45.167 h1 r90
D4: Top Overlay "A" at 46.5,43.167 h1 r90; Top Overlay "K" at 49.25,43.167 h1 r90; Bottom Overlay "K" at 49.25,43.833 h1 r90; Bottom Overlay "A" at 46.5,43.833 h1 r90; Mechanical 13 "A" at 46.5,45.167 h1 r90; Mechanical 13 "K" at 49.25,45.167 h1 r90
D5: Top Overlay "A" at 54.5,43.167 h1 r90; Top Overlay "K" at 57.25,43.167 h1 r90; Bottom Overlay "K" at 57.25,43.833 h1 r90; Bottom Overlay "A" at 54.5,43.833 h1 r90; Mechanical 13 "A" at 54.5,45.167 h1 r90; Mechanical 13 "K" at 57.25,45.167 h1 r90
PWR: Top Overlay "A" at 18.083,44.5 h1 r180; Top Overlay "K" at 18.083,47.25 h1 r180; Bottom Overlay "K" at 17.417,47.25 h1 r180; Bottom Overlay "A" at 17.417,44.5 h1 r180; Mechanical 13 "A" at 16.083,44.5 h1 r180; Mechanical 13 "K" at 16.083,47.25 h1 r180